# Altium PCB Interfaz MIDI.PcbDoc
Units mm, origin at the board's own origin, x right, y up, seen from the top; angles counter-clockwise.
Board outline 22 x 21.5 mm, 2 copper layers (Top Layer, Bottom Layer); 8 components, 0 nets, 24 pads, 0 vias.
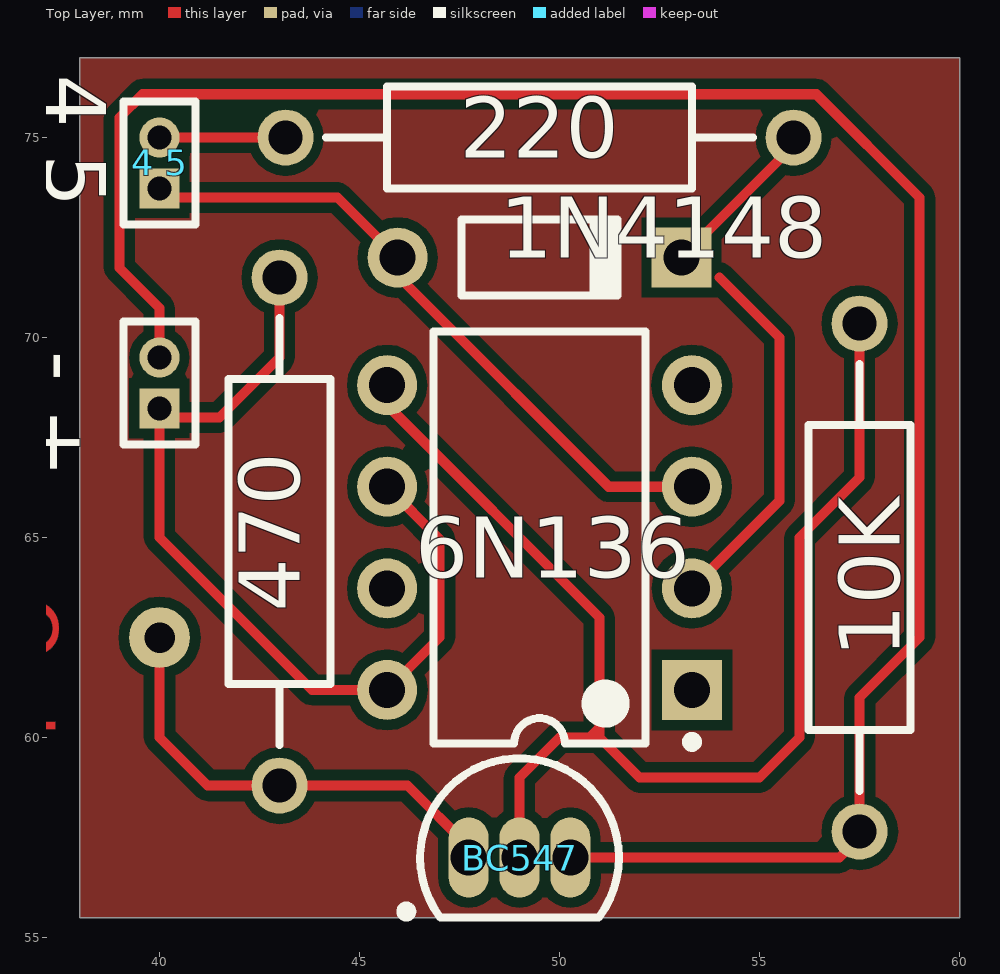
[diagram p0: Top Layer view]
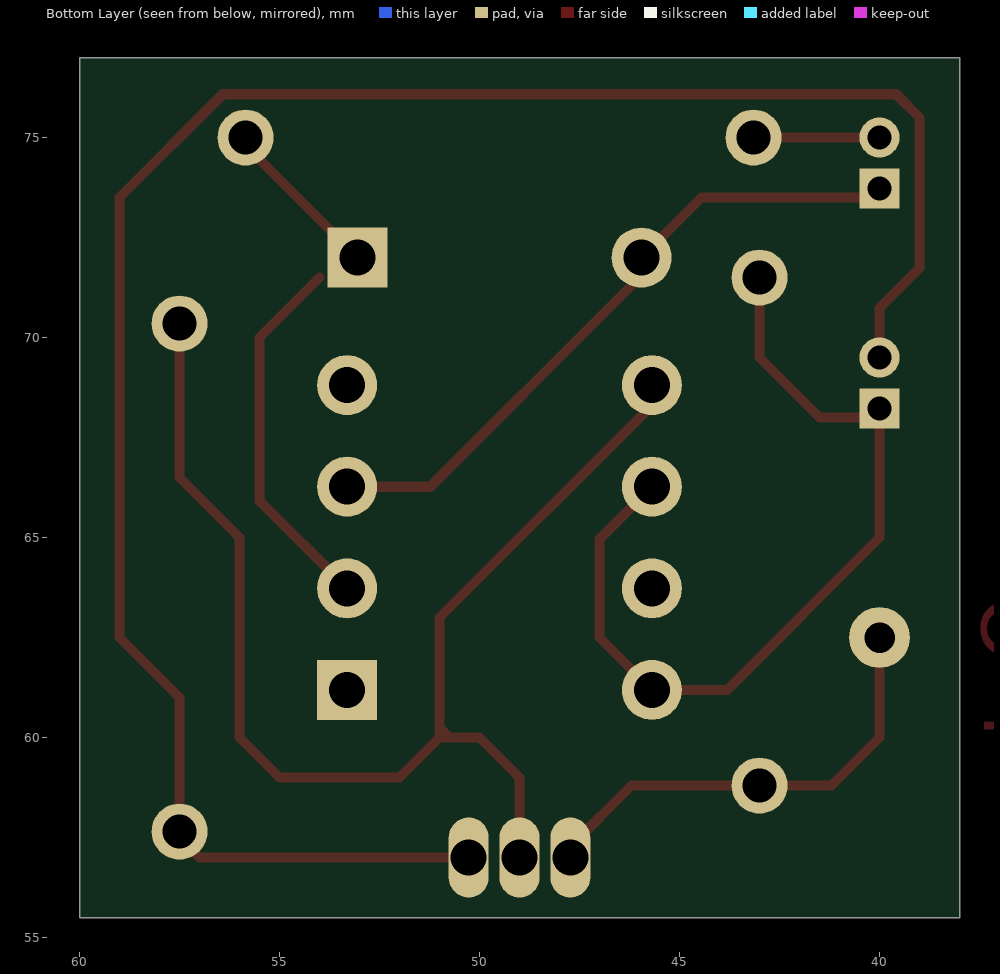
[diagram p1: Bottom Layer view, seen from below]

## Layer stack, top to bottom
Top Solder: solder mask 0.0102, Solder Resist, Dk 3.5
Top Layer: signal copper 0.0356
Dielectric 1: dielectric 0.32, FR-4, Dk 4.8
Bottom Layer: signal copper 0.0356
Bottom Solder: solder mask 0.0102, Solder Resist, Dk 3.5

## Board outline
38,55.5 60,55.5 60,77 38,77

## Design rules (kind name [scope] priority, off if disabled: settings)
Clearance [All] p1: gap=0.254
PolygonConnect [All] p1: connectstyle=Relief reliefconductorwidth=0.254 reliefentries=4 polygonreliefangle="90 Angle" airgapwidth=0.254
RoutingVias [All] p1: holewidth=0.711 width=1.27 viastyle="Through Hole" minholewidth=0.711 minwidth=1.27 maxholewidth=0.711 maxwidth=1.27
SolderMaskExpansion [All] p1: expansion=0.102
Width [All] p1: maxlimit=0.254 minlimit=0.254 preferedwidth=0.254
30 further rules are at their usual default settings.

## Components (designator, comment, footprint, x,y, rotation, side; value= is the part's Value field where it differs from the comment)
1N4148 "Comment" DO-35 49.5,72 r0 top
"4 5" "Comment" MHDR1X2 40,73.73 r90 top
6N136 "Comment" DIP-8 49.5,65 r180 top
10K "Comment" AXIAL-0.5 57.5,64 r90 top
220 "Comment" AXIAL-0.5 49.5,75 r0 top
470 "Comment" AXIAL-0.5 43,65.15 r90 top
"+ -" "Comment" MHDR1X2 40,68.23 r90 top
BC547 "Comment" TO-92A 49,57 r270 top

## Footprints (in the part's own frame and the unit in brackets; to place one, negate y for a bottom-side part, rotate by r counter-clockwise, add the part's x,y. Pads: shape width x height; smd on the part's side, far side on the other; paste and mask are expansions set on the pad)
AXIAL-0.5 [mm] "Axial Device, Thru-Hole; 2 Leads; 0.5 in Pin Spacing"
  round 1.4 hole 0.85: 1(-6.35,0) 2(6.35,0)
  silkscreen extent -5.33,-1.27 5.33,1.27
DIP-8 [mm] "DIP; 8 Leads; Row Spacing 7.62 mm; Pitch 2.54 mm"
  rect 1.5x1.5 hole 0.9: 1(-3.81,3.81)
  round 1.5 hole 0.9: 2(-3.81,1.27) 3(-3.81,-1.27) 4(-3.81,-3.81) 5(3.81,-3.81) 6(3.81,-1.27) 7(3.81,1.27) 8(3.81,3.81)
  silkscreen extent -3.94,-5.15 2.65,5.23, body extent -3.6,-5.15 3.6,5.15, height 5.08
DO-35 [mm] "Diode, Axial; Body 3.8 x 1.9 mm (LxDia. max), Lead Dia. 0.53 mm (max)"
  round 1.5 hole 0.9: 1(-3.55,0)
  rect 1.5x1.5 hole 0.9: 2(3.55,0)
  silkscreen extent -1.95,-0.95 2.05,0.95
MHDR1X2 [mm] "Connector; Header; 2 Position"
  rect 1x1 hole 0.6: 1(0,0)
  round 1 hole 0.6: 2(1.27,0)
  silkscreen extent -0.9,-0.9 2.17,0.9
TO-92A [mm] "TO, Flat Index; 3 In-Line, Axial Leads; Body Dia. 4.5mm; Leads 0.51 x 0.48 mm (max)"
  oval 2x1 hole 0.9: 1(0,-1.27) 2(0,0) 3(0,1.27)
  silkscreen extent -2.48,-2.95 1.5,2.48, body extent -2.48,-2.5 1.5,2.5, height 6.86

## Part data
1N4148: library part "Diode 1N4148"
"4 5" "+ -": library part MHDR1X2
6N136: library part SW-DIP4
10K 220 470: library part "Res Semi"
BC547: library part 2N3904

## Free pads (board coordinates)
  round 1.524 hole 0.762: 2(40,62.5)

## Nets (pads, with @x,y where several pads share a name; then routed paths per layer and width w, separated by ;. In a path a pad name is that pad's centre, name@x,y a point inside that pad or via, vN(x,y) a via of type N, cw(c..) or ccw(c..) an arc to the next point about the centre after c; other vN are vias at no path point)
pads on no net: 1N4148.1 1N4148.2 6N136.1 6N136.2 6N136.3 6N136.4 6N136.5 6N136.6 6N136.7 6N136.8 10K.1 10K.2 220.1 220.2 470.1 470.2 "4 5.1" "4 5.2" "+ -.1" "+ -.2" BC547.1 BC547.2 BC547.3
copper on no net: | length 148.8
  Top Layer w0.254: 40,62 40,60 41.2,58.8 43,58.8 46.2,58.8 47.73,57.27 ; 40,68 41.5,68 43,69.5 43,71.5 ; 40,68.23 40,67 40,65 43.81,61.19 45.69,61.19 ; 40,69.5 40,70.738 39,71.738 39,72.674 39,73.309 39,75.5 39.581,76.081 56.419,76.081 59,73.5 59,62.5 57.5,61 57.5,57.65 ; 40,73.5 41.5,73.5 44.45,73.5 45.95,72 45.95,71.55 ; 40,75 42,75 43.15,75 ; 45.69,66.27 47,64.96 47,62.5 46,61.5 ; 45.69,68.81 45.69,68.31 51,63 51,60 ; 46,71.5 46.525,70.975 51.23,66.27 53.31,66.27 ; 49,57.5 49,59 50,60 51,60 ; 50.27,57 56,57 57,57 57.5,57.5 ; 50.75,60 50.95,60.2 ; 53.05,72.05 53.05,72 55.5,74.45 ; 53.31,63.73 55.5,65.92 55.5,70 54,71.5 ; 57.5,70.35 57.5,67 57.5,66.5 56,65 56,60 55,59 52,59 51,60

## Polygon pours and split planes (outlines as drawn)
no net on Top Layer "Top Layer-No Net" (solid, pour order 0): 38,55.5 60,55.5 60,77 38,77

## Keep-outs
Top Layer:
  lines w0.254: 6.75,109.35 14.1,109.35

## Other copper
Top Layer:
  text "MIDI IN" at 33.875,80.125 h1.52 r270
  text "Out" at 35.925,63.55 h1.52 r270